# Altium PCB PCB1.PcbDoc
Units mil, origin at the board's own origin, x right, y up, seen from the top; angles counter-clockwise.
Board outline 2755 x 3780 mil, 2 copper layers (Top Layer, Bottom Layer); 83 components, 74 nets, 369 pads, 62 vias.
Unrouted connection lines stored in the file: 1.
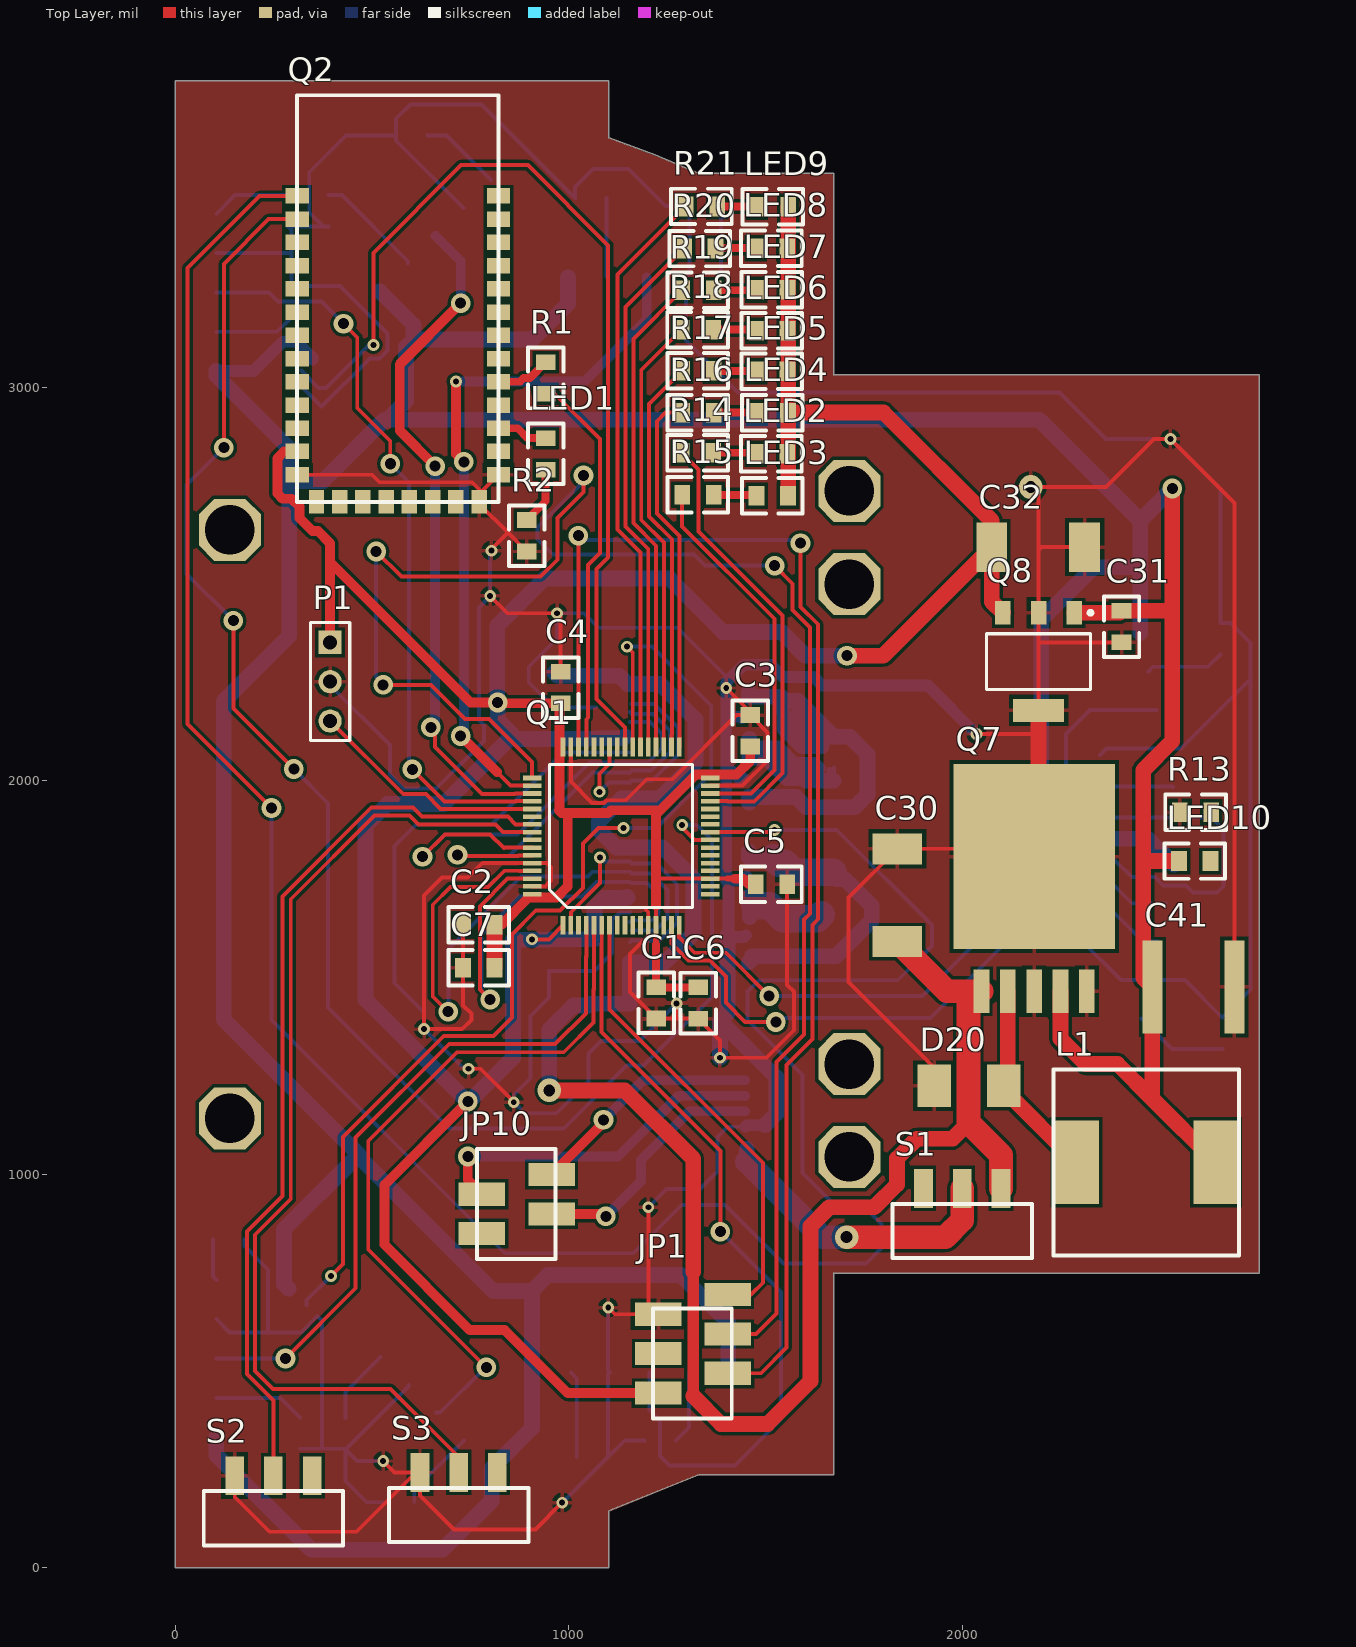
[diagram p0: Top Layer view]
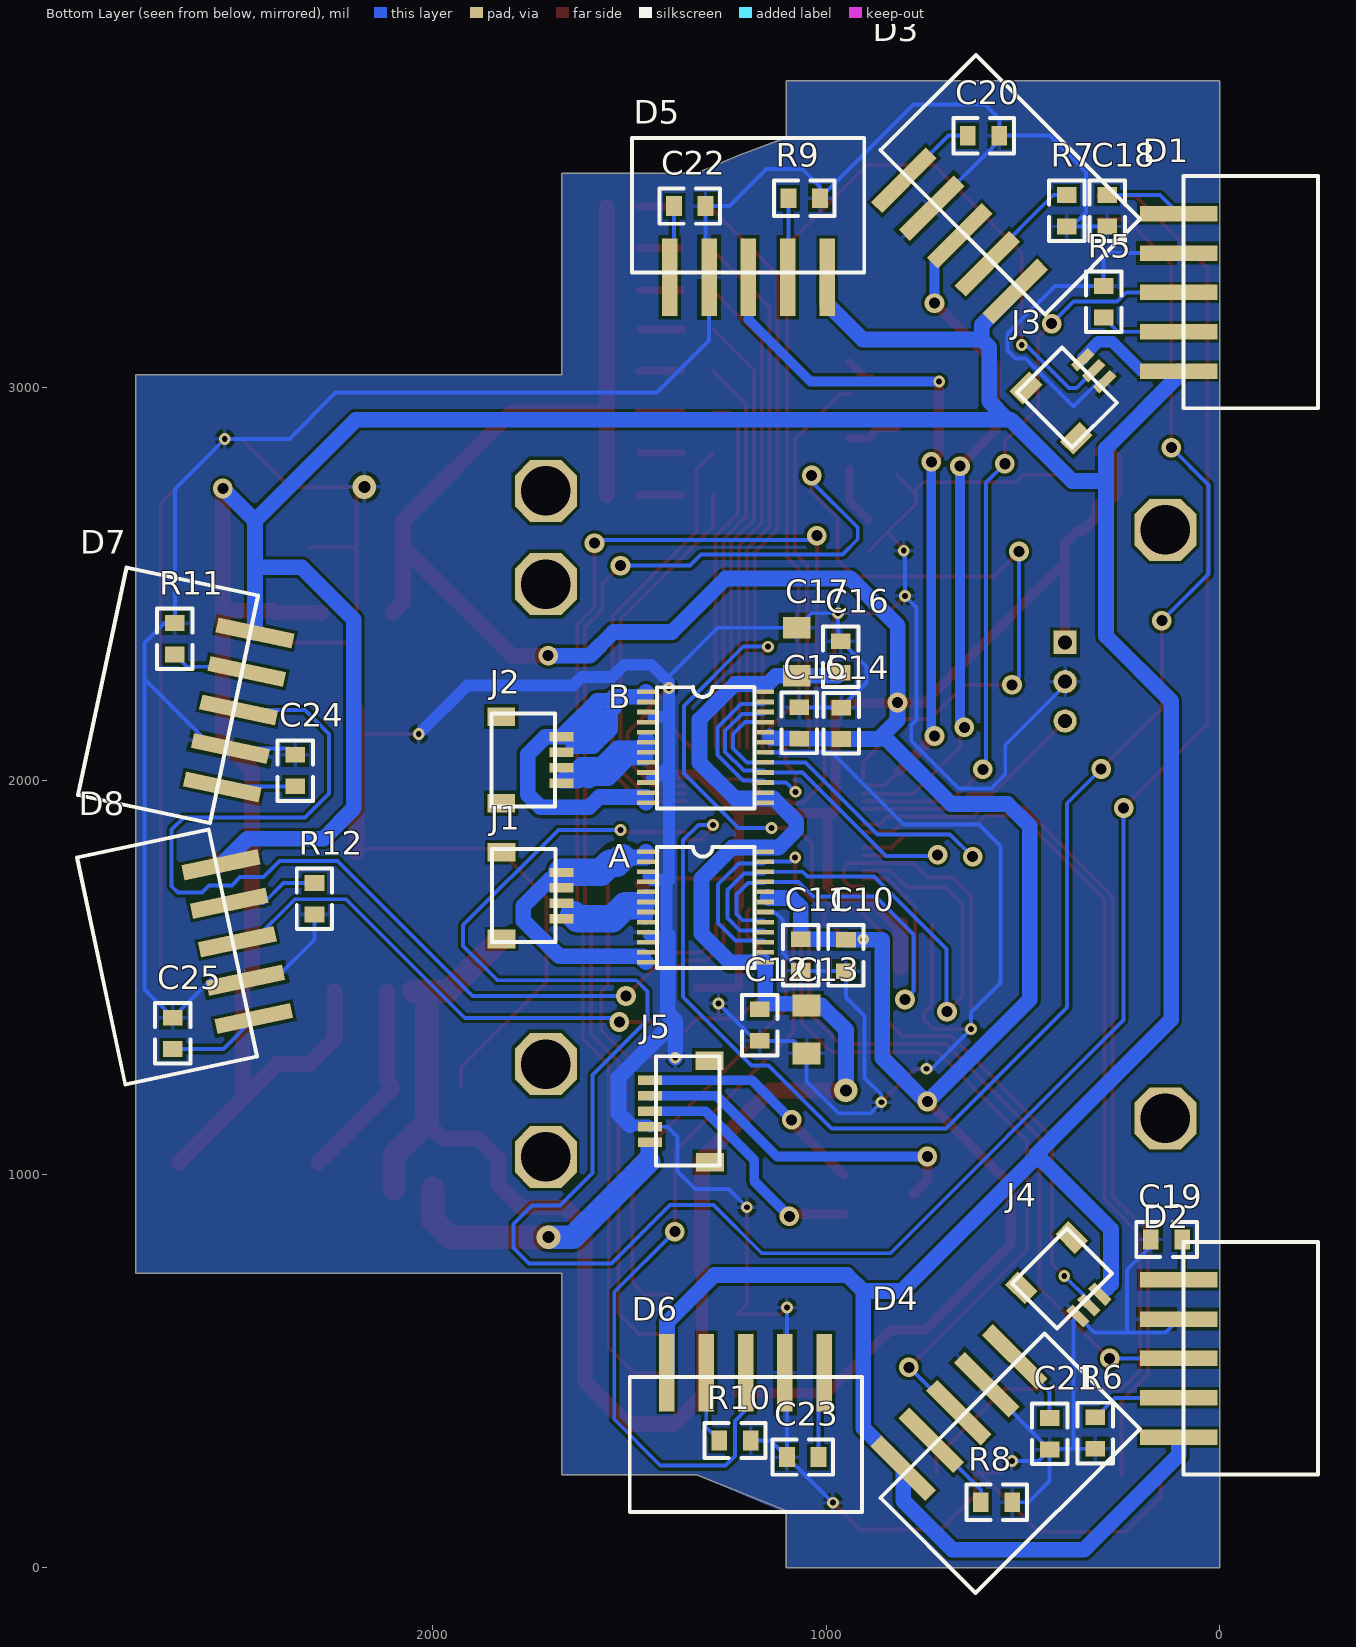
[diagram p1: Bottom Layer view, seen from below]
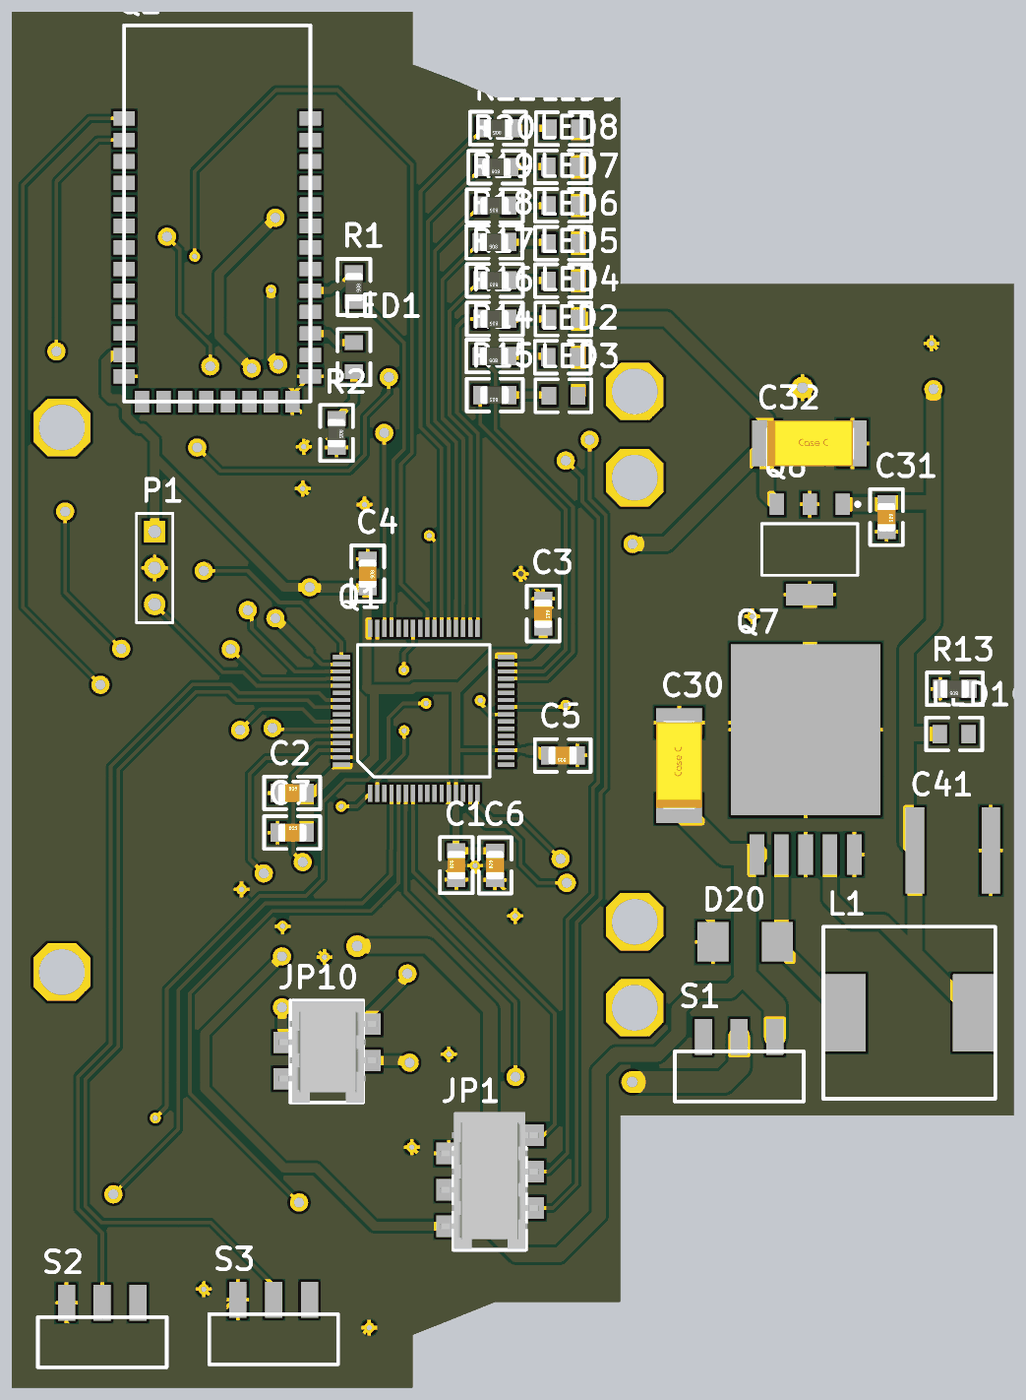
[diagram p2: 3D render of the assembled board from above, using the file's embedded part models]
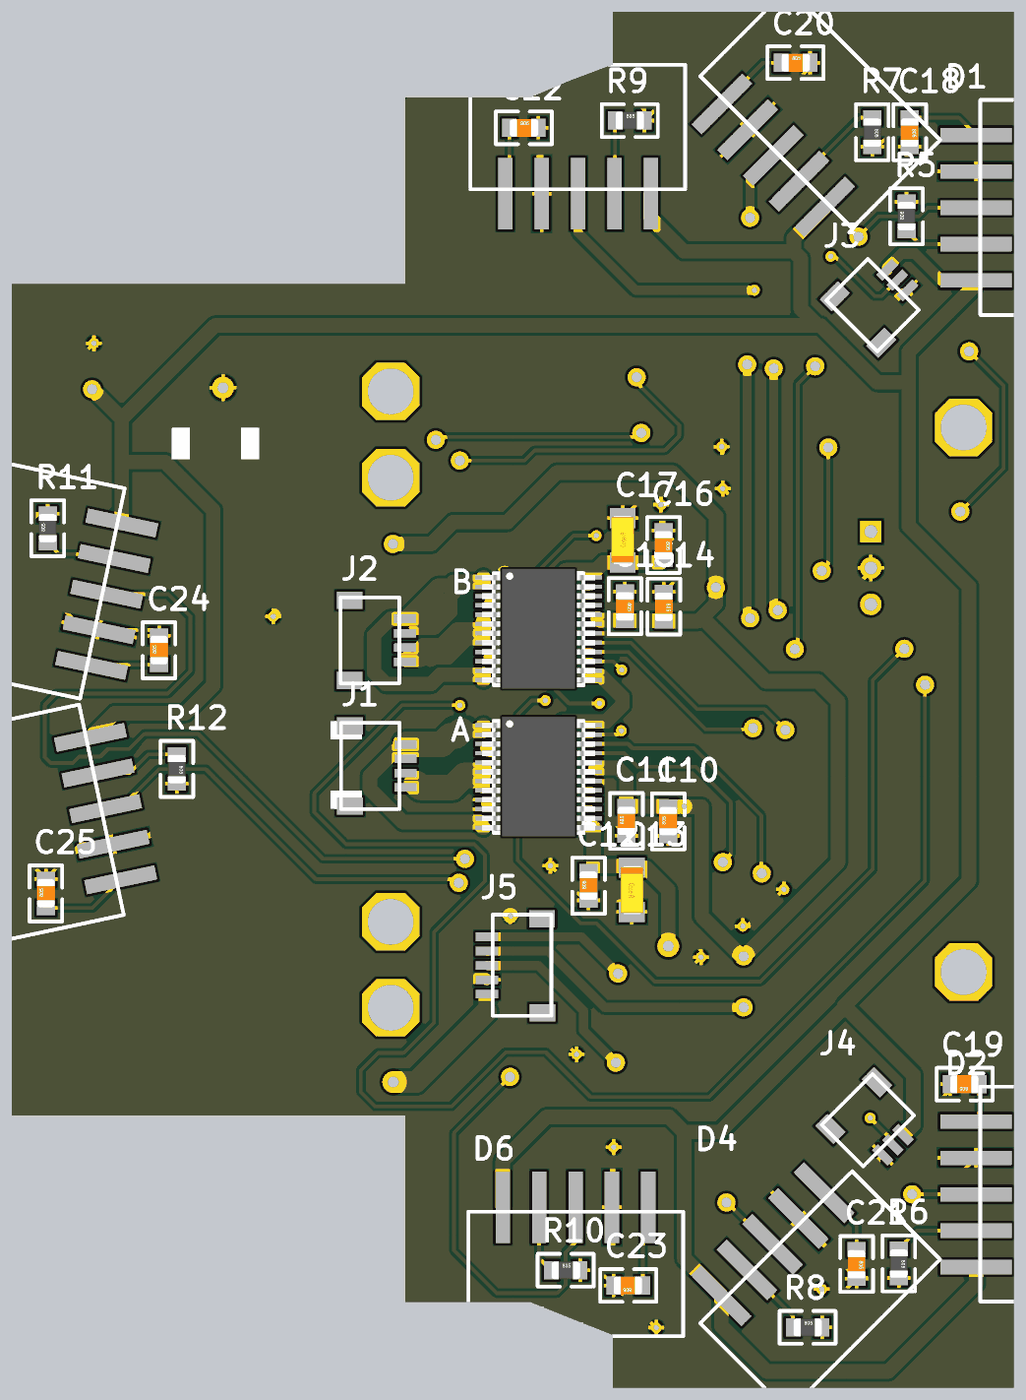
[diagram p3: 3D render of the assembled board from below, using the file's embedded part models]

## Layer stack, top to bottom
Top Layer: signal copper 1.4
Dielectric: dielectric 12.6, FR-4, Dk 4.8
Bottom Layer: signal copper 1.4

## Board outline
0,3780 1102,3780 1102,3635 1219,3591 1330,3544 1673,3544 1673,3032 2755,3032 2755,748 1673,748 1673,236 1330,236 1102,145 1102,0 0,0

## Design rules (kind name [scope] priority, off if disabled: settings)
Clearance Clearance_1 [All] p1: gap=8
Clearance [InNet('GND')] p2: gap=20
PolygonConnect [All] p1: connectstyle=Relief reliefconductorwidth=10 reliefentries=4 polygonreliefangle="90 Angle" airgapwidth=10
RoomDefinition Sheet1 [InComponentClass('Sheet1')] p1: confinementstyle=ConfineIn formatcopy=TRUE lockcomponents=FALSE outline -500,-281 4429,-281 4429,3984 -500,3984
RoutingVias [All] p1: holewidth=20 width=50 viastyle="Through Hole" minholewidth=28 minwidth=50 maxholewidth=30 maxwidth=70
SolderMaskExpansion [All] p1: expansion=7
Width [All] p1: maxlimit=70 minlimit=10 preferedwidth=10
28 further rules are at their usual default settings.

## Components (designator, comment, footprint, x,y, rotation, side; value= is the part's Value field where it differs from the comment)
A "TB6612" SSOP24 1458,1820 r180 bottom
B "TB6612" SSOP24 1458,2226 r180 bottom
C1 "100n" "0805 CAP" 1222.5,1475.5 r180 top
C2 "100n" "0805 CAP" 811,1634 r90 top
C3 "100n" "0805 CAP" 1461,2087 r0 top
C4 "100n" "0805 CAP" 979,2197 r0 top
C5 "100n" "0805 CAP" 1475,1737 r270 top
C6 "1u" "0805 CAP" 1329,1475 r180 top
C7 "10u" "0805 CAP" 811,1525 r90 top
C10 "10u" "0805 CAP" 950,1596 r0 bottom
C11 "100n" "0805 CAP" 1065,1597 r0 bottom
C12 "100n" "0805 CAP" 1169,1419 r0 bottom
C13 "22u" TANTAL_A 1050,1429 r270 bottom
C14 "10u" "0805 CAP" 962,2106 r180 bottom
C15 "100n" "0805 CAP" 1069,2107 r180 bottom
C16 "100n" "0805 CAP" 963,2275 r180 bottom
C17 "22u" TANTAL_A 1075,2267 r90 bottom
C18 "100n" "0805 CAP" 286,3409 r180 bottom
C19 "100n" "0805 CAP" 175,834 r270 bottom
C20 "100n" "0805 CAP" 560,3640 r90 bottom
C21 "100n" "0805 CAP" 432,300 r180 bottom
C22 "100n" "0805 CAP" 1307,3461 r90 bottom
C23 "100n" "0805 CAP" 1100,281 r270 bottom
C24 "100n" "0805 CAP" 2350,2066 r0 bottom
C25 "100n" "0805 CAP" 2661,1398 r0 bottom
C30 "100u" TANTAL_C 1835,1591 r90 top
C31 "470n" "0805 CAP" 2405,2352 r0 top
C32 "33u" TANTAL_C 2075,2594 r0 top
C41 "1000u" TANTAL_R 2495,1476 r0 top
D1 "GP2Y" "gp2y smd" 92,3537.55 r270 bottom
D2 "GP2Y" "gp2y smd" 92,827.55 r270 bottom
D3 "GP2Y" "gp2y smd" 862,3603 r225 bottom
D4 "GP2Y" "gp2y smd" 445,595 r315 bottom
D5 "GP2Y" "gp2y smd" 1494,3292 r180 bottom
D6 "GP2Y" "gp2y smd" 909,484 r0 bottom
D7 "GP2Y" "gp2y smd" 2567,1893 r102 bottom
D8 "GP2Y" "gp2y smd" 2447,1299 r78 bottom
D20 "Schottky" SMB 2007,1225 r0 top
J1 "4PIN_1MM" CON_1mm_4pin 1771,1716 r270 bottom
J2 "4PIN_1MM" CON_1mm_4pin 1772,2061 r270 bottom
J3 "3PIN_1MM" CON_1MM_3PIN 376,2959 r225 bottom
J4 "3PIN_1MM" CON_1MM_3PIN 416,723 r315 bottom
J5 "bateria-plytka" CON_1MM_5PIN 1350,1162 r90 bottom
JP1 "HEADER 3X2" "MM3X2 SMD" 1404,494 r90 top
JP10 "HEADER 2X2" "MM2X2 SMD" 956,899 r90 top
L1 "100uH" CEWKA 2881,1030 r90 top
LED1 "LED_0805" 0805 941,2791 r0 top
LED2 "LED_0805" 0805 1475,2831 r270 top
LED3 "LED_0805" 0805 1477,2725 r270 top
LED4 "LED_0805" 0805 1477,2936 r270 top
LED5 "LED_0805" 0805 1476,3041 r270 top
LED6 "LED_0805" 0805 1476,3144 r270 top
LED7 "LED_0805" 0805 1476,3248 r270 top
LED8 "LED_0805" 0805 1475,3354 r270 top
LED9 "LED_0805" 0805 1478,3459 r270 top
LED10 "LED_0805" 0805 2631,1796 r90 top
P1 "Header 3" HDR1X3 393,2352 r270 top
Q1 "STM32F303RCT6" STM32F303RCT6 1008,1736 r90 top
Q2 "HC-06" PCBComponent_1 575,3221 r0 top
Q7 "LM2576" LM2576 2049,1268 r0 top
Q8 "LM3940IMP" LM3940IMP 2194,2303 r270 top
R1 "470" "0805 RES" 941,2984 r0 top
R2 "22" "0805 RES" 893,2583 r0 top
R5 "1" "0805 RES" 295,3258 r0 bottom
R6 "1" "0805 RES" 316,302 r180 bottom
R7 "1" "0805 RES" 389,3409 r180 bottom
R8 "1" "0805 RES" 527,166 r90 bottom
R9 "1" "0805 RES" 1016,3481 r90 bottom
R10 "1" "0805 RES" 1192,323 r90 bottom
R11 "1" "0805 RES" 2656,2401 r0 bottom
R12 "1" "0805 RES" 2301,1660 r180 bottom
R13 "150" "0805 RES" 2553,1920 r270 top
R14 "68" "0805 RES" 1287,2834 r270 top
R15 "68" "0805 RES" 1288,2727 r270 top
R16 "68" "0805 RES" 1288,2936 r270 top
R17 "68" "0805 RES" 1288,3042 r270 top
R18 "68" "0805 RES" 1287,3147 r270 top
R19 "68" "0805 RES" 1288,3247 r270 top
R20 "68" "0805 RES" 1293,3353 r270 top
R21 "68" "0805 RES" 1297,3460 r270 top
S1 "Switch" Switch 2000,885 r180 top
S2 "Switch" Switch 249,155 r180 top
S3 "Switch" Switch 720,163 r180 top

## Footprints (in the part's own frame and the unit in brackets; to place one, negate y for a bottom-side part, rotate by r counter-clockwise, add the part's x,y. Pads: shape width x height; smd on the part's side, far side on the other; paste and mask are expansions set on the pad)
0805 [mil]
  rect 50x40 smd: 1(0,0) 2(0,80)
  silkscreen extent -45,-37 45,117
"0805 CAP" [mil]
  rect 50x40 smd: 1(0,0) 2(0,80)
  silkscreen extent -45,-37 45,117, body extent -25,0 25,79, height 31
"0805 RES" [mil]
  rect 50x40 smd: 1(0,0) 2(0,80)
  silkscreen extent -45,-37 45,117, body extent -25,0 25,79, height 31
CEWKA [mm]
  rect 5.4x2.9 smd: 1(0,15) 2(0,6)
  silkscreen extent -6,4.5 6,16.5
CON_1MM_3PIN [mm]
  rect 0.6x1.55 smd: 1(-1.5,2.5) 2(-0.5,2.5) 3(0.5,2.5)
  rect 1.2x1.8 smd: NC(-2.8,-1.375) NC(1.8,-1.375)
  silkscreen extent -3,-2 2.02,2.1
CON_1mm_4pin [mm]
  rect 0.6x1.55 smd: 1(-1.3,2.5) 2(-0.3,2.5) 3(0.7,2.5) 4(1.7,2.5)
  rect 1.2x1.8 smd: NC(-2.6,-1.375) NC(3,-1.375)
  silkscreen extent -2.8,-2 3.2,2.1
CON_1MM_5PIN [mm]
  rect 0.6x1.55 smd: 1(-2.05,2.5) 2(-1.05,2.5) 3(-0.05,2.5) 4(0.95,2.5) 5(1.95,2.5)
  rect 1.2x1.8 smd: NC(-3.35,-1.375) NC(3.2,-1.35)
  silkscreen extent -3.55,-2 3.5,2.1
"gp2y smd" [mm]
  rect 1x5 smd: 1(2.438,-0.3) 2(4.978,-0.3) 3(7.518,-0.3) 4(10.058,-0.3) 5(12.598,-0.3)
  silkscreen extent 0,0 15,8.7
HDR1X3 [mm] "Connector; Header; 3 Position"
  rect 1.5x1.5 hole 0.9: 1(0,0)
  round 1.5 hole 0.9: 2(2.54,0) 3(5.08,0)
  silkscreen extent -1.27,-1.27 6.35,1.27
LM2576 [mil]
  rect 40x110 smd: 1(0,196.85) 2(66.93,196.85) 3(133.86,196.85) 4(200.79,196.85) 5(267.72,196.85)
  rect 410x470 smd: 3(133.86,539.37)
LM3940IMP [mm] "LM3940IMIP"
  rect 1.5x1 smd: GND(-3.15,0) IN(-3.15,2.3) OUT(-3.15,-2.3)
  rect 1.5x3.3 smd: GND(3.15,0)
  silkscreen extent -3.27,-3.35 1.8,3.48, body extent -1.85,-3.35 1.86,3.35, height 1.6
"MM2X2 SMD" [mm]
  rect 1.5x3 smd: 1(0,0) 2(-1.27,4.5) 3(2.54,0) 4(1.27,4.5)
  silkscreen extent -2.92,-0.25 4.19,4.83, body extent -2.95,-1.25 4.15,5.65, height 5.25
"MM3X2 SMD" [mm]
  rect 1.5x3 smd: 1(0,0) 2(-1.27,4.5) 3(2.54,0) 4(1.27,4.5) 5(5.08,0) 6(3.81,4.5)
  silkscreen extent -2.92,-0.25 4.19,4.83, body extent -2.87,-1.16 6.68,5.74, height 5.2
PCBComponent_1 [mm]
  rect 1.5x1 smd: 3(-6.75,3.75) 3V3(-6.75,-9.75) 4(-6.75,2.25) 5(-6.75,0.75) 6(-6.75,-0.75) 7(-6.75,-2.25) 8(-6.75,-3.75) 9(-6.75,-5.25) 10(-6.75,-6.75) 11(-6.75,-8.25) 23(6.25,-9.75) 25(6.25,-6.75) 27(6.25,-3.75) 28(6.25,-2.25) 29(6.25,-0.75) 30(6.25,0.75) 31(6.25,2.25) 32(6.25,3.75) 33(6.25,5.25) 34(6.25,6.75) GND(-6.75,-11.25) GND(6.25,-11.25) KEY(6.25,-5.25) LED(6.25,-8.25) UART_RXD(-6.75,5.25) UART_TXD(-6.75,6.75)
  rect 1x1.5 smd: 14(-5.5,-13) 15(-4,-13) 16(-2.5,-13) 17(-1,-13) 18(0.5,-13) 19(2,-13) 20(3.5,-13) GND(5,-13)
  silkscreen extent -6.75,-13 6.25,13.25
SMB [mil]
  rect 85x107.99 smd: 1(-78.74,0) 2(98.43,0)
SSOP24 [mm]
  rect 1.143x0.3 smd: 1(0,0) 2(0,-0.65) 3(0,-1.3) 4(0,-1.95) 5(0,-2.6) 6(0,-3.25) 7(0,-3.9) 8(0,-4.55) 9(0,-5.2) 10(0,-5.85) 11(0,-6.5) 12(0,-7.15) 13(7.7,-7.15) 14(7.7,-6.5) 15(7.7,-5.85) 16(7.7,-5.2) 17(7.7,-4.55) 18(7.7,-3.9) 19(7.7,-3.25) 20(7.7,-2.6) 21(7.7,-1.95) 22(7.7,-1.3) 23(7.7,-0.65) 24(7.7,0)
  silkscreen extent 0.7,-7.52 7,0.3, body extent -0.1,-7.89 7.8,0.74, height 1.88
STM32F303RCT6 [mm]
  rect 0.3x1.2 smd: BOOT0(1.39,2.579) PA3(-0.61,-8.921) PA4(0.89,-8.921) PA5(1.39,-8.921) PA6(1.89,-8.921) PA7(2.39,-8.921) PA14(6.89,2.579) PA15(6.39,2.579) PB0(3.89,-8.921) PB1(4.39,-8.921) PB2(4.89,-8.921) PB3(3.89,2.579) PB4(3.39,2.579) PB5(2.89,2.579) PB6(2.39,2.579) PB7(1.89,2.579) PB8(0.89,2.579) PB9(0.39,2.579) PB10(5.39,-8.921) PB11(5.89,-8.921) PC4(2.89,-8.921) PC5(3.39,-8.921) PC10(5.89,2.579) PC11(5.39,2.579) PC12(4.89,2.579) PD2(4.39,2.579) PF4(-0.11,-8.921) VDD_1(-0.61,2.579) VDD_2(6.89,-8.921) VDD_4(0.39,-8.921) VSS_1(-0.11,2.579) VSS_2(6.39,-8.921)
  rect 1.2x0.3 smd: NRST(-2.61,-2.421) PA0(-2.61,-5.921) PA1(-2.61,-6.421) PA2(-2.61,-6.921) PA8(8.89,-2.921) PA9(8.89,-2.421) PA10(8.89,-1.921) PA11(8.89,-1.421) PA12(8.89,-0.921) PA13(8.89,-0.421) PB12(8.89,-6.921) PB13(8.89,-6.421) PB14(8.89,-5.921) PB15(8.89,-5.421) PC0(-2.61,-2.921) PC1(-2.61,-3.421) PC2(-2.61,-3.921) PC3(-2.61,-4.421) PC6(8.89,-4.921) PC7(8.89,-4.421) PC8(8.89,-3.921) PC9(8.89,-3.421) PC13(-2.61,0.079) PC14/OSC32_IN(-2.61,-0.421) PC15/OSC32_OUT(-2.61,-0.921) PF0/OSC_IN(-2.61,-1.421) PF1/OSC_OUT(-2.61,-1.921) VBAT(-2.61,0.579) VDD_3(8.89,0.579) VDDA(-2.61,-5.421) VSS_3(8.89,0.079) VSSA/VREF-(-2.61,-4.921)
  silkscreen extent -1.47,-7.79 7.76,1.44, body extent -1.57,-7.89 7.86,1.54, height 1.6
Switch [mm]
  rect 1.2x2.5 smd: 1(-2.5,-2) 2(0,-2) 3(2.5,-2)
  silkscreen extent -4.5,-1 4.5,2.5
TANTAL_A [mm]
  rect 1.4x1.8 smd: 1(0,0) 2(3.1,0)
  body extent -0.12,-0.79 3.27,0.81, height 2.05
TANTAL_C [mm]
  rect 2x3.2 smd: 1(0,0) 2(6,0)
  body extent -0.04,-1.6 6.14,1.6, height 2.22
TANTAL_R [mm]
  rect 1.3x6 smd: 1(-0.3,0) 2(5,0)

## Part data
C1 C2 C3 C4 C5 C6 C7 C10 C11 C12 C14 C15 C16 C18 C19 C20 C21 C22 C23 C24 C25 C31: library part CAP, "Capacitor"
C13 C17: library part E
C30 C32: library part ELECTRO2, "Electrolytic Capacitor"
C41: library part TANTAL_R
J1 J2: library part CON_1MM_4PIN
J3 J4: library part CON_1MM_3PIN
J5: library part CON_1MM_5PIN
L1: library part CEWKA
P1: "Header, 3-Pin"
Q2: library part Component_1, "Bluetooth"
R1 R2 R5 R6 R7 R8 R9 R10 R11 R12 R13 R14 R15 R16 R17 R18 R19 R20 R21: library part R

## Free pads (board coordinates)
  oct 157.48x157.48 hole 125.98: 1(138,1142) 1(138,2638) 1(1713,1044) 1(1713,1280) 1(1713,2500) 1(1713,2737)

## Via types
v1: diameter 50, hole 28, Top Layer to Bottom Layer, 34 vias
v2: diameter 30, hole 15, Top Layer to Bottom Layer, 25 vias
v3: diameter 60, hole 30, Top Layer to Bottom Layer, 3 vias

## Nets (pads, with @x,y where several pads share a name; then routed paths per layer and width w, separated by ;. In a path a pad name is that pad's centre, name@x,y a point inside that pad or via, vN(x,y) a via of type N, cw(c..) or ccw(c..) an arc to the next point about the centre after c; other vN are vias at no path point)
5V: C31.2 C41.1 D1.5 D2.5 D3.5 D4.5 D5.5 D6.5 D7.5 D8.5 J3.1 J4.1 L1.2 LED10.2 Q7.4 Q8.IN | length 13115.2
  Top Layer w40: Q7.4 2249.79,1344.21 2314,1280 2394.78,1280 2483.19,1191.59 ; Q8.IN 2400.02,2427.02 C31.2 2533,2432 ; 2466,1796 LED10.2 ; v1(2534,2743) 2534,2101 2460,2027 2460,1499.19 C41.1 2483.19,1191.59 ; L1.2 2483.19,1191.59
  Bottom Layer w30: D1.5 198.15,3041.55 272.6,3116 308,3116 348.16,3075.84 J3.1
  Bottom Layer w40: D2.5 103.81,286.19 345,45 679,45 804.08,170.08 D4.5 906,354.55 906,703 ; D1.5 103.81,3030.19 289,2845 289,2762 ; 288,709 276,721 276,860 453,1037 474,1037 808,703 906,703 ; 466,1050 123,1393 123,2202 289,2368 289,2762 ; D3.5 605,3158.55 605,3122 ; 541,2920 586,2965 586,3103 605,3122 ; D5.5 998,3213 907,3122 605,3122 ; D6.5 1405,623 1284,744 947,744 906,703 ; D7.5 2452.32,2543 ; v1(2534,2743) 2452.32,2661.32 ; D8.5 2472.19,1853 2278,1853 2201,1930 2201,2410 2334,2543 2452.32,2543 ; 289,2762 375,2762 531,2918 2195.65,2918 2452.32,2661.32 ; 2452.32,2543 2452.32,2661.32
BAT1: J5.3 JP10.1 | length 637.2
  Top Layer w25: JP10.1 1088,899 v1(1094,893)
  Bottom Layer w25: v1(1094,893) 1183,982 1183,1036 1307.03,1160.03 J5.3
BAT2: J5.4 JP10.4 | length 893.2
  Top Layer w25: v1(743,1045) 743,984.83 JP10.4
  Bottom Layer w25: v1@743,1034 v1(743,1045) 1125,1045 1279.4,1199.4 J5.4 J5.4@1447.02,1198
BAT3: J5.5 JP10.3 | length 595.8
  Top Layer w25: JP10.3 1088,1131 v1(1088,1138)
  Bottom Layer w25: v1(1088,1138) 1188.77,1238.77 J5.5
GND: A.3 A.4 A.9 A.10 A.18 B.3 B.4 B.9 B.10 B.18 C1.2 C2.2 C3.2 C4.2 C5.2 C6.2 C7.2 C10.2 C11.2 C12.2 C13.2 C14.2 C15.2 C16.2 C17.2 C18.1 C19.1 C20.1 C21.1 C22.1 C23.1 C24.1 C25.1 C30.2 C31.1 C32.2 C41.2 D1.2 D2.2 D3.2 D4.2 D5.2 D6.2 D7.2 D8.2 D20.1 J3.3 J4.3 J5.2 JP1.6 P1.2 Q1.BOOT0 Q1.VSS_1 Q1.VSS_2 Q1.VSS_3 Q1.VSSA/VREF- Q2.GND Q7.3 Q7.5 Q8.GND R2.1 R5.1 R6.1 R7.1 R8.1 R9.1 R10.1 R11.1 R12.1 R13.1 S2.3 S3.3 | length 27276.1
  Top Layer w10: S2.3 150.57,179.43 239,91 460,91 S3.3@610.74,241.74 ; Q2.GND@309.25,2778.09 499.91,2778.09 519,2759 754,2759 771.85,2741.15 Q2.GND@771.85,2728.87 ; v2(528,271) 557.26,241.74 S3.3@610.74,241.74 ; C2.2 C7.2 731,1429 752,1408 752,1392 729,1369 v2(632,1369) 632,1708 678,1754 743,1754 779.72,1790.72 Q1.BOOT0 944.28,1790.72 955,1780 955,1747 939.67,1731.67 Q1.VSS_1 ; v2(745,1268) 775,1268 v2(860,1183) ; v2(800,2470) 844,2426 v2(970,2426) 979,2417 C4.2 ; v2(803,2585) 803,2589 845,2631 ; Q2.GND@821.06,2778.09 Q2.GND@771.85,2728.87 ; R2.1 845,2631 ; v2(983,165) 915,97 708,97 621.57,183.43 S3.3 S3.3@610.74,241.74 ; Q1.VSS_3 1004.89,1998.11 1059,1944 1089.6,1944 1096.1,1950.5 1144.5,1950.5 1198,2004 1263,2004 1426,2167 C3.2 ; v2(1100,661) 1117,644 JP1.6 1202,668.83 v2(1202,916) ; 1195.93,1673.07 1195.93,1671.86 1201.74,1666.05 Q1.VSSA/VREF- Q1.VSSA/VREF-@1201.74,1609.78 ; 1201.74,1606.74 1155,1560 1155,1463 C1.2 1274,1395.5 ; v2(1274,1434) 1274,1395.5 ; Q1.VSS_2 1441.57,1987.57 1505,2051 1505,2123 C3.2 ; v2(1400,2236) 1461,2175 C3.2 ; C5.2 1555,1481 1572,1464 1572,1366 1502,1296 v2(1384,1296) 1384,1340 C6.2 1328.5,1395.5 1274,1395.5 ; D20.1 1928.26,1271.74 1711,1489 1711,1703.22 C30.2 2185.29,1827.22 Q7.3@2194,1818.51 ; v2(2036,2119) 2194,2119 ; Q8.GND@2194,2178.98 2194,2351 ; C32.2 2201,2594 2194,2587 ; C31.1 2195,2352 2194,2351 ; C41.2 2691.85,2706.15 v2(2529,2869) 2487,2869 2365,2747 v3(2174,2747) 2194,2727 2194,2587 ; Q2.GND@771.85,2728.87 771.85,2709.19 771.85,2704.15 845,2631 ; 2194,2351 2194,2427.02 2194,2587
  Top Layer w40: Q7.3@2194,1818.51 2194,2119 Q8.GND@2194,2178.98
  Bottom Layer w10: D2.2 137.36,598 236,598 ; D1.2 291.45,3341.55 295,3338 ; C19.1 175,817 235,757 235,599 236,598 ; J3.3 307.32,3014.68 371,2951 494,3074 519,3074 539,3094 539,3137 418,3258 R5.1 295,3338 ; R6.1 372,302 ; R7.1 R7.1@376,3409 ; P1.2 393,2243 545,2091 545,2016 580,1981 664,1981 784,2101 784,2142 771,2155 771,2441 v2(800,2470) 800,2582 v2(803,2585) ; R8.1 486,166 432,220 C21.1 ; v2(528,271) 461,271 C21.1 ; D4.2 591.94,459.94 C21.1 ; D3.2 560,3627.81 C20.1 ; v2(745,1268) 733,1268 v2(632,1369) 632,1411 557,1486 557,1834 612,1889 803,1889 986,2072 1154.39,2072 B.18 ; v2(983,165) 984,165 C23.1 ; C15.2 1068,2186 C14.2 898,2250 898,2290 C16.2 970,2362 v2(970,2426) 1038.05,2426 C17.2 1275.95,2389.05 1400,2265 v2@1400,2250 ; v2(1100,661) 1100,500.81 D6.2 1100,490.81 C23.1 ; A.18 1153.94,1665.55 1129.92,1665.55 1110,1645.63 1110,1562 C11.2 1064,1516 C10.2 950,1449 903,1402 903,1245 860,1202 v2(860,1183) 888,1155 969,1155 1050,1236 C13.2 1082.05,1339 C12.2 1179,1339 v2(1274,1434) ; R10.1 1142,323 C23.1 ; v2(1202,916) 1248,962 1333,962 1378,1007 1378,1095 1403.66,1120.66 J5.2 ; 1403,1607 1410,1614 ; 1406,1618 1410,1614 ; 1421,1603 1410,1614 ; R12.1 2301,1596 2403.83,1493.17 D8.2 2565.83,1493.17 C25.1 2733,1470 2733,2259 ; C24.1 2366.26,2082.26 D7.2 2556.26,2082.26 2733,2259 ; 236,598 318.84,598 J4.3 372,627.81 372,302 ; 295,3338 295,3400 C18.1 R7.1@376,3409 ; 372,302 430,302 C21.1 ; R7.1@376,3409 340,3445 340,3547 433,3640 C20.1 ; C20.1 560,3682 597,3719 778,3719 R9.1 1016,3510 1061,3555 1152,3555 1246,3461 C22.1 1307,3289.19 D5.2 1298,3119 1430,2987 2247,2987 2365,2869 v2(2529,2869) 2656,2742 R11.1 2682,2401 2733,2350 2733,2259
  Bottom Layer w30: 1406,1618 1406,1740 1400,1746 ; 1421,1603 1445.72,1603 1450.36,1607.64 ; 1440,2160 1437,2163 1400,2163 ; 1443,2008 1430,2008 1400,2038 ; J5.2 1452.3,1124.53 1498.53,1124.53 ; 1452,1757 1443,1748 1402,1748 1400,1746 ; v2(2036,2119) 1913,2242 1644,2242 1622,2264 1544,2264 1513,2295 1445,2295 1400,2250 v2(1400,2236) 1400,2163 ; 1400,1746 1400,2038 ; 1400,2038 1400,2163
  Bottom Layer w40: v2(1384,1296) 1384,1390 ; 1403,1607 1403,1409 1384,1390 ; 1498.53,1124.53 1528,1154 1528,1246 1384,1390
IN1A: A.17 A.21 Q1.PB9 | length 1229.4
  Top Layer w10: v1(800,1444) 774,1470 774,1681 844.35,1751.35 Q1.PB9
  Bottom Layer w10: v1(800,1444) 778,1466 778,1609 875,1706 1033,1706 1070.23,1743.23 A.21 ; A.17 1159.54,1645.55 1212.55,1645.55 1228,1661 1228,1711 1199,1740 A.21@1158.08,1740
IN1B: B.17 B.21 Q1.PB6 | length 1171.6
  Top Layer w10: v1(628,1807) 685,1864 800,1864 835,1829 836.09,1830.09 Q1.PB6
  Bottom Layer w10: v1(628,1807) 685,1864 870,1864 1052.87,2046.87 B.17 1201.87,2046.87 1237,2082 1237,2119 1206.77,2149.23 B.21
IN2A: A.16 A.22 Q1.PB8 | length 1589.3
  Top Layer w10: v1(693,1413) 654,1452 654,1685 699,1730 794.72,1730 836.07,1771.35 874,1771.35 ; 874.31,1771.04 Q1.PB8
  Bottom Layer w10: v1@694,1392 694,1572 879,1757 1048.18,1757 1060,1768.82 A.22 1159.54,1764.13 1208.87,1764.13 1251,1722 1251,1651 1219.96,1619.96 A.16@1159.53,1619.96
IN2B: B.16 B.22 Q1.PB7 | length 1017.6
  Top Layer w10: v1(717,1812) 720,1809 871,1809 872.41,1810.41 Q1.PB7
  Bottom Layer w10: v1(717,1812) 720,1809 847.72,1809 1060,2021.28 B.16 1159.53,2025.96 1209.24,2025.96 1257,2073.72 1257,2127.28 1214.15,2170.13 1159.54,2170.13 B.22
KEY: Q1.PA12 R1.1 | length 976.3
  Top Layer w10: R1.1 964,2984 1079,2869 1079,2579 1049,2549 1049,2161 ; Q1.PA12 1044.26,2156.26
KTIR1: J3.2 Q1.PC9 | length 2571.4
  Top Layer w10: v2(503,3108) 503,3342 726,3565 896,3565 1100,3361 1100,2568 1070,2538 1070,2208 1142.69,2135.31 Q1.PC9
  Bottom Layer w10: J3.2 364,2998.84 382.84,2998.84 492,3108 v2(503,3108)
KTIR2: J4.2 Q1.PC8 | length 2683.4
  Top Layer w10: v2(395,741) 426,772 426,1095 682,1351 808,1351 855,1398 855,1609 915.87,1669.87 977.87,1669.87 1036,1728 1036,1841 1075,1880 v2(1139,1880) ; v2(1148,2341) 1162.37,2326.63 Q1.PC8
  Bottom Layer w10: J4.2 332.48,678.48 v2(395,741) ; v2(1139,1880) 1223,1880 1362,2019 1362,2190 1211,2341 v2(1148,2341)
LED1: Q1.PB10 R14.1 | length 1133.5
  Top Layer w10: R14.1 1330,2791 1330,2633.28 1543,2420.28 1543,2019.72 1471.17,1947.89 1403.89,1947.89 ; Q1.PB10 1403.57,1948.2
LED2: Q1.PB11 R15.1 | length 985
  Top Layer w10: R15.1 1288,2647 1523,2412 1523,2028 1463,1968 1399,1968 1398.89,1967.89 Q1.PB11
LED3: Q1.PB12 R16.1 | length 925
  Top Layer w10: Q1.PB12@1281.7,2086 1281.7,2622.3 1224,2680 1224,2914 1246,2936 R16.1
LED4: Q1.PB13 R17.1 | length 1013.8
  Top Layer w10: Q1.PB13 1260.8,2117.06 ; 1261.7,2117.96 1261.7,2614.02 1204,2671.72 1204,2958 R17.1
LED5: Q1.PB14 R18.1 | length 1127
  Top Layer w10: Q1.PB14 1241.11,2154.41 ; 1241.7,2155 1241.7,2605.73 1184,2663.43 1184,3044 R18.1
LED6: Q1.PB15 R19.1 | length 1236.2
  Top Layer w10: 1221.11,2162.69 1221.7,2163.28 1221.7,2597.45 1164,2655.15 1164,3123 R19.1 ; Q1.PB15 1221.43,2162.38
LED7: Q1.PC6 R20.1 | length 1352.6
  Top Layer w10: 1201.7,2589.16 1144,2646.86 1144,3204 R20.1 ; Q1.PC6 1201.74,2589.12
LED8: Q1.PC7 R21.1 | length 1469.3
  Top Layer w10: 1181.74,2134 1181.74,2580.84 1124,2638.58 1124,3287 R21.1 ; Q1.PC7 1182.06,2133.69
M_OUT1A: A.1 A.2 A.11 A.12 J1.1 J1.2 | length 760.9
  Bottom Layer w40: A.12 1465,1545.5 1465,1553.78 1678.78,1553.78 1770,1645 1770,1682 1702,1750 1680.85,1750 ; A.1 1458,1804.72 1458.28,1805 1519,1805
  Bottom Layer w70: 1519,1805 1533,1791 1549,1791 1572.82,1767.18 J1.1
M_OUT1B: B.1 B.2 B.11 B.12 J2.1 J2.2 | length 1082.9
  Bottom Layer w40: B.12 1458,1959.78 1459,1958.78 1577.22,1958.78 1603,1933 1726.7,1933 1759,1965.3 1759,2067 1713.82,2112.18 J2.1 ; B.1 1458,2214 1540,2214 ; 1540,2185 1557.88,2202.88 1582.88,2202.88 J2.1 ; 1549,2163 1549,2132 1593,2088 1642.88,2088 ; 1574,2163 1624.82,2112.18 J2.1
M_OUT2A: A.5 A.6 A.7 A.8 J1.3 J1.4 | length 268.2
  Bottom Layer w40: 1460,1653 1460,1682 ; A.6@1460,1692.05 1460,1702 1457,1705 1457,1684 1459,1682 1460,1682 ; 1481,1682 1460,1682
  Bottom Layer w70: 1481,1682 1511,1682 1543.93,1649.07 1631.07,1649.07 1642,1660
M_OUT2B: B.5 B.6 B.7 B.8 J2.3 J2.4 | length 619.6
  Bottom Layer w10: J2.3 J2.4@1673.57,2000.43 ; J2.4@1673.57,2000.43 J2.4 1667.22,2000.43 1660,2007.65 1660,2030 1665,2030 1665,2009 J2.4@1673.57,2000.43
  Bottom Layer w40: 1603.46,2000.43 1597.1,2006.78 1554.22,2006.78 1502,2059 1459,2059 1459,2083 ; 1616.52,2013.48 1629.57,2000.43 1667.22,2000.43 J2.4@1673.57,2000.43 ; 1632,2031 1623,2040 1573.12,2040 1530.12,2083 1459,2083 ; 1459,2083 1459,2107 1457,2105 1457,2083 1459,2083
NetC18_2: C18.2 D1.1 | length 201.8
  Bottom Layer w10: D1.1 151.26,3489 C18.2
NetC19_2: C19.2 D2.1 | length 106.1
  Bottom Layer w10: C19.2 95,740.36 D2.1
NetC20_2: C20.2 D3.1 | length 209.4
  Bottom Layer w10: C20.2 689.24,3640 D3.1
NetC21_2: C21.2 D4.1 | length 192.4
  Bottom Layer w10: C21.2 432,446.24 D4.1
NetC22_2: C22.2 D5.1 | length 185.4
  Bottom Layer w10: C22.2 1387,3291.19 D5.1
NetC23_2: C23.2 D6.1 | length 221
  Bottom Layer w10: D6.1 1020,480.81 C23.2
NetC24_2: C24.2 D7.1 | length 186.1
  Bottom Layer w10: C24.2 2533.93,1986 D7.1
NetC25_2: C25.2 D8.1 | length 237.6
  Bottom Layer w10: D8.1 2532.76,1318 C25.2
NetD1_2: D1.4 R5.2 | length 206.3
  Bottom Layer w10: D1.4 258.55,3141.55 R5.2
NetD2_2: D2.4 R6.2 | length 232.7
  Bottom Layer w10: D2.4 266.45,431.55 R6.2
NetD3_2: D3.4 R7.2 | length 277.7
  Bottom Layer w10: R7.2 423,3489 590.34,3321.66 D3.4
NetD4_2: D4.4 R8.2 | length 209.7
  Bottom Layer w10: R8.2 607,196.97 D4.4
NetD5_2: D5.4 R9.2 | length 201.6
  Bottom Layer w10: R9.2 1096,3282.19 D5.4
NetD6_2: D6.4 R10.2 | length 186.5
  Bottom Layer w10: R10.2 1305,356 D6.4
NetD7_2: D7.4 R11.2 | length 200.7
  Bottom Layer w10: D7.4 2485.22,2290 2625,2290 R11.2
NetD8_2: D8.4 R12.2 | length 238
  Bottom Layer w10: R12.2 2380,1740 2431.2,1688.8 D8.4
NetD20_2: D20.2 L1.1 Q7.2 | length 515.8
  Top Layer w40: Q7.2 2115.93,1235.5 D20.2 2105.43,1215.02 L1.1
NetJ5_1: J5.1 S1.2 | length 758.1
  Top Layer w60: v3(1706,840) 1957,840 2000,883 S1.2
  Bottom Layer w40: 1452,1032 1452,1064
  Bottom Layer w60: 1452,1032 1644,840 v3(1706,840)
NetLED1_1: LED1.1 R2.2 | length 147.9
  Top Layer w20: R2.2 941,2711 LED1.1
NetLED1_2: LED1.2 Q2.LED | length 130.4
  Top Layer w20: Q2.LED 869.8,2896.2 895,2871 LED1.2
NetLED2_1: LED2.1 R14.2 | length 105
  Top Layer w20: R14.2 LED2.1@1472,2834
NetLED3_1: LED3.1 R15.2 | length 107
  Top Layer w20: R15.2 LED3.1@1475,2727
NetLED4_1: LED4.1 R16.2 | length 109
  Top Layer w20: R16.2 LED4.1
NetLED5_1: LED5.1 R17.2 | length 107
  Top Layer w20: R17.2 LED5.1@1475,3042
NetLED6_1: LED6.1 R18.2 | length 106
  Top Layer w20: R18.2 LED6.1@1473,3147
NetLED7_1: LED7.1 R19.2 | length 107
  Top Layer w20: R19.2 LED7.1@1475,3247
NetLED8_1: LED8.1 R20.2 | length 101
  Top Layer w20: R20.2@1374,3354 LED8.1
NetLED9_1: LED9.1 R21.2 | length 100
  Top Layer w20: R21.2 LED9.1@1477,3460
NetLED10_1: LED10.1 R13.2
NetQ2_8: Q2.KEY R1.2 | length 140.5
  Top Layer w20: Q2.KEY 875.31,3014.31 885,3024 901,3024 R1.2
PWMA: A.15 A.23 Q1.PC13 | length 658.6
  Top Layer w10: Q1.PC13 1004.89,1665.89 1079,1740 v2(1079,1805)
  Bottom Layer w10: v2(1079,1805) 1089.59,1794.41 A.23 ; A.15 1159.54,1594.37 1230.37,1594.37 1275,1639 1275,1737 1222.28,1789.72 A.23@1159.53,1789.72
PWMB: B.15 B.23 Q1.PA9 | length 574.7
  Top Layer w10: v2(1078,1972) 1078,2018 1103.31,2043.31 Q1.PA9
  Bottom Layer w10: v2(1078,1972) 1101.69,1995.69 B.15 1159.54,2000.37 1211.94,2000.37 1277,2065.43 1277,2135.57 1216.84,2195.72 B.23@1159.53,2195.72
RESET: JP1.5 Q1.NRST | length 1171.6
  Top Layer w10: 1103.31,1586.69 Q1.NRST ; 1103.63,1586.37 1103.63,1418.37 1493,1029 1493,724 1463,694 JP1.5
SHARP1: D1.3 Q1.PC11 | length 1898.9
  Top Layer w10: v1(427,3162) 462,3127 462,2948 546,2864 v1(546,2806) ; v1(602,2029) 684,1947 864,1947 ; 865.2,1948.2 Q1.PC11
  Bottom Layer w10: D1.3 237.45,3241.55 261,3218 371,3218 v1(427,3162) ; v1(546,2806) 594,2758 594,2037 v1(602,2029)
SHARP2: D2.3 Q1.PC15/OSC32_OUT | length 1751.3
  Top Layer w10: v1(279.55,531.55) 458,710 458,1093 696,1331 965,1331 1043,1409 1043,1477.28 1043.94,1478.23 1043.94,1553 ; 1044.26,1553.31 Q1.PC15/OSC32_OUT
  Bottom Layer w10: D2.3 v1(279.55,531.55)
SHARP3: D3.3 Q1.PC10 | length 1726.3
  Top Layer w10: v1@650,2136 660,2126 660,2086 779,1967 863,1967 ; 863.89,1967.89 Q1.PC10
  Top Layer w25: v1(660,2800) 570,2890 570,3059 v1(725,3214)
  Bottom Layer w25: v1@660,2136 v1(660,2800) ; D3.3 725,3321.39 v1(725,3214)
  other v1: 649,2136
SHARP4: D4.3 Q1.PF0/OSC_IN | length 1818.6
  Top Layer w10: v1(790,509) 490,809 490,1084 716,1310 987,1310 1063,1386 1063,1469 ; 1063.94,1469.94 Q1.PF0/OSC_IN
  Bottom Layer w10: D4.3 673.05,394.05 788,509 v1(790,509)
SHARP5: D5.3 Q1.PA15 | length 1792.8
  Top Layer w10: 817,2022 851.43,1987.57 Q1.PA15
  Top Layer w25: v2(713,3015) 713,2831 v1(733,2811) ; v1@733,2106 817,2022
  Bottom Layer w25: v2(713,3015) 1040,3015 1198,3173 D5.3 ; v1(725,2114) 733,2122 v1(733,2811)
SHARP6: D6.3 Q1.PF1/OSC_OUT | length 2032.9
  Top Layer w10: 1083,1585.74 1083,1361 1385,1059 v1(1385,854) ; 1083.63,1586.37 Q1.PF1/OSC_OUT
  Bottom Layer w10: D6.3 1205,400 1232,373 1232,284 1256,260 1422,260 1539,377 1539,700 v1(1385,854)
SHARP7: D7.3 Q1.PA2 | length 2646.3
  Top Layer w10: 1280.48,1601.52 Q1.PA2 ; 1280.8,1601.2 1319,1563 1399,1563 v1(1509,1453)
  Bottom Layer w10: v1(1509,1453) 1899,1453 2242,1796 2390,1796 2431,1755 2490,1755 2511,1734 2569,1734 2586.76,1716.24 2648.24,1716.24 2664,1732 2664,1876 2633,1907 2325,1907 2264,1968 2264,2119 2325.08,2180.08 D7.3
SHARP8: D8.3 Q1.PA1 | length 1571.7
  Top Layer w10: 1260.8,1586.2 Q1.PA1 ; 1263,1584 1304,1543 1359,1543 1399,1503 1399,1436 1448,1387 v1(1526,1387)
  Bottom Layer w10: v1@1526,1397 1919,1397 2221,1699 2351,1699 2459.01,1590.99 D8.3
START: P1.3 Q1.PC12 | length 606
  Top Layer w10: P1.3 579,1966 636.72,1966 674.2,1928.52 Q1.PC12
SW1: Q1.PB3 S2.2 | length 2287.3
  Top Layer w10: S2.2 249,424.72 182,491.72 182,854.28 272,944.28 272,1706.28 497.72,1932 603.28,1932 626.28,1909 845,1909 864.54,1889.46 869,1889.46 ; 864.85,1889.15 Q1.PB3
SW2: Q1.PB4 S3.2 | length 2604
  Top Layer w10: S3.2 720,281 547,454 248,454 202,500 202,846 293,937 293,1699 506,1912 595,1912 618,1889 813,1889 832.54,1869.46 Q1.PB4
SWCLK: JP1.3 Q1.PA14 | length 4553.5
  Top Layer w10: v1(510,2583) 574,2519 928,2519 971,2562 971,2668 1037,2734 v1(1037,2776) ; v1(528,2244) 649,2244 736,2157 797,2157 906.46,2047.54 Q1.PA14 ; JP1.3 1476,594 1528,646 1528,1285 1598,1355 1598,1647 1613,1662 1613,2389.72 1569,2433.72 1569,2501 v1(1523,2547)
  Bottom Layer w10: v1(510,2583) 510,2264 528,2246 v1(528,2244) ; v1(1037,2776) 1037,2761 920,2644 920,2614 959,2575 1318,2575 1346,2547 v1(1523,2547)
SWDIO: JP1.1 Q1.PA13 | length 3380.3
  Top Layer w10: v1(1024,2623) 1024,2365 1024.57,2364.43 Q1.PA13 ; JP1.1 1488,494 1553,559 1553,1278 1619,1344 1619,1634 1633,1648 1633,2398 1589,2442 v1(1589,2604)
  Bottom Layer w10: v1(1024,2623) 1035,2612 1574,2612 v1@1585.5,2600.5
USART1_RX: Q1.PC5 Q2.UART_TXD | length 6352.2
  Top Layer w10: v1(244,1931) 31,2144 31,3304 213.75,3486.75 Q2.UART_TXD ; Q1.PC5 1360,1870.24 1518.24,1870.24 v2(1523,1875)
  Bottom Layer w10: v1(244,1931) 244,1392 837,799 1164,799 1287,922 1397,922 1546,773 1756,773 1795,812 1795,873 1748,920 1677,920 1594,1003 1594,1252 1454,1392 1454,1464 1483,1493 1836,1493 1923,1580 1923,1633 1681,1875 v2(1523,1875) v2@1522,1876
USART1_TX: Q1.PC4 Q2.UART_RXD | length 4136
  Top Layer w10: v1(123,2847) 123,3314 236.69,3427.69 Q2.UART_RXD ; v1(147,2407) 147,2184 v1(301,2030) ; v2(1288,1888) 1288,1881 1319.22,1849.78 Q1.PC4
  Bottom Layer w10: v1(123,2847) 28,2752 28,2526 v1(147,2407) ; v1(301,2030) 388,1943 388,1424 696,1116 987,1116 1147,1276 1190,1276 1364,1450 1364,1849 1325,1888 v2(1288,1888)
VBAT: A.13 A.14 A.24 B.13 B.14 B.24 C12.1 C13.1 C16.1 C17.1 C30.1 Q7.1 S1.1 | length 5119.5
  Top Layer w30: 1316,436 1316,752
  Top Layer w40: v3(950,1213) 1142,1213 1316,1039 1316,752 ; 1316,436 1387,365 1505,365 1614,474 1614,868 1662,916 1776,916 1834,974 1834,1040 1884,1090 1975,1090 2016,1131
  Top Layer w60: C30.1 1961.15,1464.85 Q7.1 ; 2016,1460.85 2016,1131 2098.43,1048.57 S1.1
  Bottom Layer w40: v3(950,1213) 950,1367 1012,1429 C13.1 1054.15,1433.15 1154.85,1433.15 A.13 1244.5,1538.5 1317,1611 1317,1752 1238.69,1830.31 1120.69,1830.31 1076,1875 1076,1897 1134,1955 1231,1955 1322,2046 1322,2156 1232,2246 1149,2246 1128,2267 C17.1 971,2267 C16.1
VCC: A.19 A.20 B.19 B.20 C1.1 C2.1 C3.1 C4.1 C5.1 C6.1 C7.1 C10.1 C11.1 C14.1 C15.1 C32.1 JP1.2 LED2.2 LED3.2 LED4.2 LED5.2 LED6.2 LED7.2 LED8.2 LED9.2 P1.1 Q1.VBAT Q1.VDD_1 Q1.VDD_2 Q1.VDD_3 Q1.VDD_4 Q1.VDDA Q2.3V3 Q8.OUT | length 10735.5
  Top Layer w10: v2(906,1597) 948.96,1597 Q1.VBAT ; 1221.43,1596.43 Q1.VDDA 1221.43,1682.43 ; 1221.43,1750 1222.78,1751.35 Q1.VDD_4 1403.65,1751.35
  Top Layer w15: 1221.43,1583.43 1221.43,1596.43 ; 1403.65,1751.35 1421.65,1751.35 1422,1751
  Top Layer w20: 1221.43,1583.43 1221.43,1476.57 C1.1 1223,1475 C6.1
  Top Layer w25: Q2.3V3 276.14,2837.14 259,2820 259,2730.45 272.45,2717 295,2717 315,2697 315,2668 348,2635 362,2635 393,2604 393,2556.17 ; P1.1 393,2556.17 ; v1(743,1185) 531,973 531,821 747.83,604.17 836.83,604.17 997,444 JP1.2 ; C2.1 828.48,1634 897.74,1703.26 969.26,1703.26 997,1731 997,1914 ; 975,1925 981.5,1918.5 1100.16,1918.5 1106.66,1925 1221.43,1925 1221.43,1914 ; 976.48,1928.48 976.48,2194.48 C4.1 821,2197 v1(819,2199) 750.17,2199 393,2556.17 ; 1221.43,1682.43 1221.43,1750 1221.43,1914 ; 1422,1751 1444,1751 1458,1737 C5.1 ; C3.1 1461,2050.96 1426.02,2015.98 1323.41,2015.98 1221.43,1914
  Top Layer w40: C7.1 C2.1 ; LED4.2 LED4.2@1558,2936 ; LED3.2@1558,2726 LED4.2@1558,2936 ; LED9.2 LED4.2@1558,2936 ; v1(1707,2318) 1799,2318 C32.1 ; Q8.OUT 2075,2455.46 C32.1 ; LED4.2@1558,2936 1800,2936 2075,2661 C32.1
  Bottom Layer w40: v1@818,2199 818,2394 938,2514 1256,2514 1392,2378 1541,2378 1601,2318 v1(1707,2318) ; v1(819,2199) 819,2154 857,2116 682,1941 539,1941 483,1885 483,1444 744.5,1182.5 858,1296 858,1596 C10.1 951,1597 C11.1 1065,1679 1088.36,1702.36 1145.36,1702.36 1148,1705 1150,1703 ; 867,2106 C14.1 ; C14.1@963,2107 C15.1 1070.36,2108.36 1139,2108.36 1143.64,2113
pads on no net: J1.NC J2.NC J3.NC J4.NC J5.NC JP1.4 JP10.2 Q1.PA0 Q1.PA3 Q1.PA4 Q1.PA5 Q1.PA6 Q1.PA7 Q1.PA8 Q1.PA10 Q1.PA11 Q1.PB0 Q1.PB1 Q1.PB2 Q1.PB5 Q1.PC0 Q1.PC1 Q1.PC2 Q1.PC3 Q1.PC14/OSC32_IN Q1.PD2 Q1.PF4 Q2.3 Q2.4 Q2.5 Q2.6 Q2.7 Q2.8 Q2.9 Q2.10 Q2.11 Q2.14 Q2.15 Q2.16 Q2.17 Q2.18 Q2.19 Q2.20 Q2.23 Q2.25 Q2.27 Q2.28 Q2.29 Q2.30 Q2.31 Q2.32 Q2.33 Q2.34 S1.3 S2.1 S3.1

## Polygon pours and split planes (outlines as drawn)
GND on Top Layer "Top Layer-No Net" (solid, pour order 4): 0,3780 1102,3780 1102,3635 1336,3543 1673,3544 1673,3032 2755,3032 2755,748 1675,748 1673,746 1673,235 1330,235 1329,236 1329,235 1103,142 1103,1 1102,0 1101,1 0,1
GND on Bottom Layer "Top Layer-No Net" (solid, pour order 6): 0,3781 1,3780 1102,3780 1102,3638 1331,3544 1672,3545 1674,3543 1674,3032 2754,3032 2755,3031 2755,748 1675,748 1673,746 1673,235 1328,235 1327,234 1104,140 1104,2 1102,0 0,0